# Altium PCB DSP6748_F.PcbDoc (part 16 of 16)
Units mil, origin at the board's own origin, x right, y up, seen from the top; angles counter-clockwise.
Board outline 8188.98 x 4055.12 mil, 4 copper layers (Top Layer, GND, VCC, Bottom Layer); 409 components, 262 nets, 1424 pads, 350 vias.
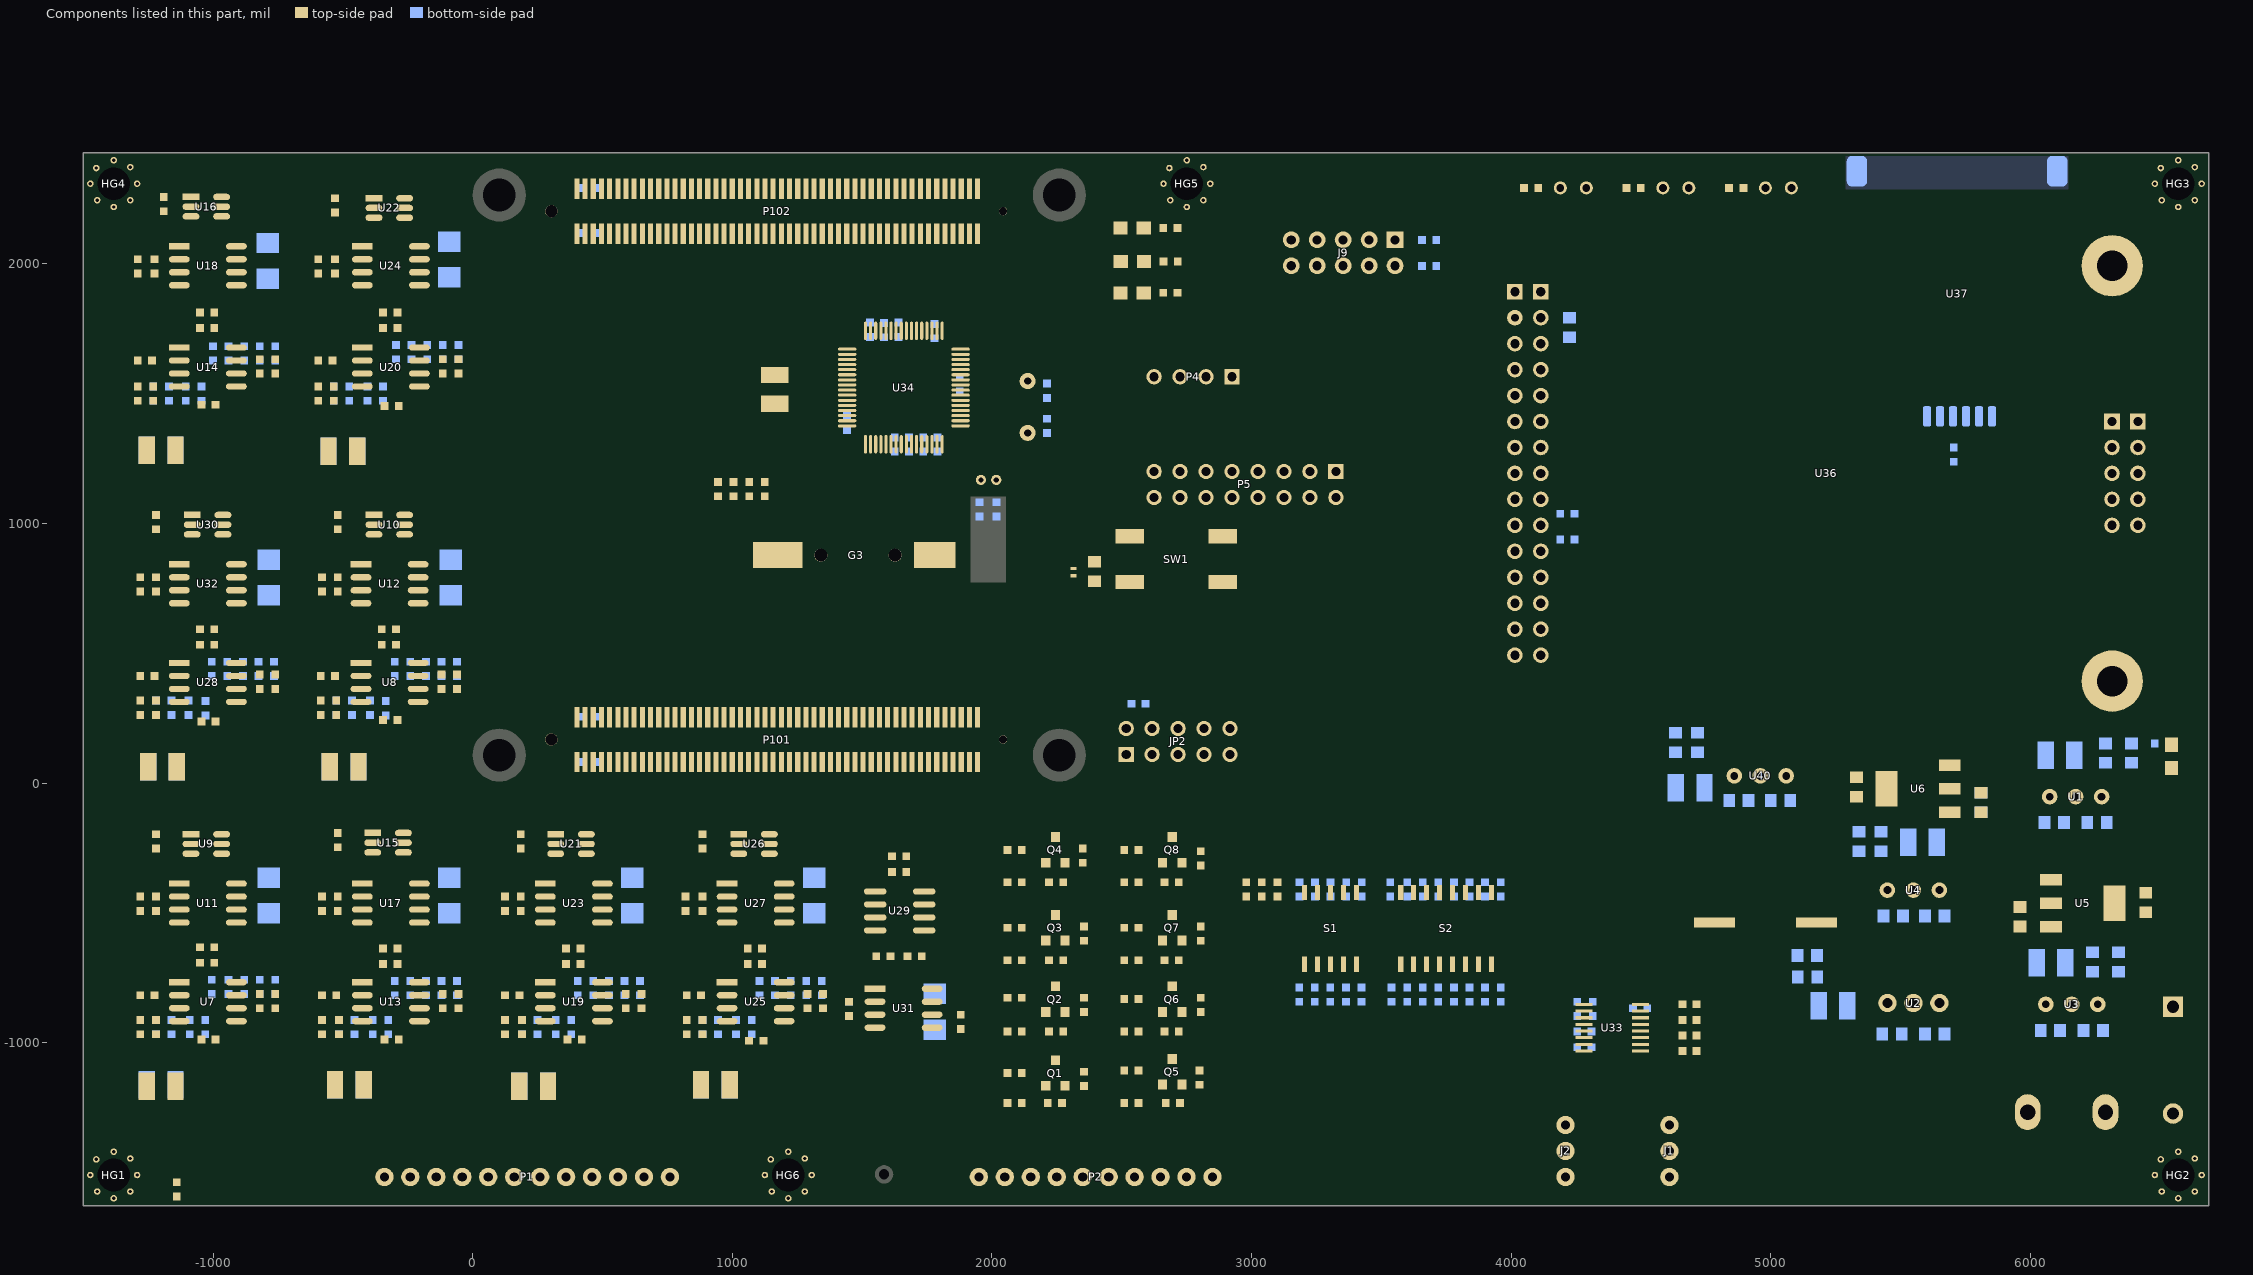
[diagram p18: the components of this part, seen from the top]

## Via types
v1: diameter 21, hole 10, Top Layer to Bottom Layer, 244 vias
v2: diameter 20, hole 10, Top Layer to Bottom Layer, 84 vias
v3: diameter 32, hole 16, Top Layer to Bottom Layer, 11 vias
v4: diameter 24, hole 12, Top Layer to Bottom Layer, 7 vias
v5: diameter 39.37, hole 19.68, Top Layer to Bottom Layer, 3 vias
v6: diameter 30, hole 15, Top Layer to Bottom Layer, 1 vias

## Nets (pads, with @x,y where several pads share a name; then routed paths per layer and width w, separated by ;. In a path a pad name is that pad's centre, name@x,y a point inside that pad or via, vN(x,y) a via of type N, cw(c..) or ccw(c..) an arc to the next point about the centre after c; other vN are vias at no path point) (continued)
pads on no net: "HG1. " "HG2. " "HG3. " "HG4. " "HG5. " "HG6. " G3.3 G3.4 JP2.7 JP2.8 P101.5 P101.33 P101.34 P101.35 P101.36 P101.37 P101.38 P101.39 P101.40 P101.43 P101.44 P101.45 P101.46 P101.47 P101.49 P101.51 P101.52 P101.53 P101.54 P101.55 P101.57 P101.61 P101.63 P101.65 P101.67 P101.73 P101.75 P101.79 P101.81 P101.101 P101.102 P102.6 P102.8 P102.10 P102.12 P102.14 P102.16 P102.18 P102.20 P102.21 P102.22 P102.26 P102.28 P102.30 P102.32 P102.34 P102.36 P102.38 P102.40 P102.43 P102.44 P102.45 P102.46 P102.48 P102.50 P102.52 P102.54 P102.55 P102.56 P102.57 P102.58 P102.61 P102.62 P102.63 P102.64 P102.65 P102.66 P102.67 P102.68 P102.70 P102.72 P102.74 P102.76 P102.79 P102.80 P102.81 P102.82 P102.83 P102.84 P102.85 P102.86 P102.88 P102.90 P102.92 P102.93 P102.94 P102.97 P102.98 P102.99 P102.100 P102.101 P102.102 U7.1 U7.5 U7.8 U8.1 U8.5 U8.8 U11.1 U11.3 U11.5 U11.7 U11.8 U12.1 U12.3 U12.5 U12.7 U12.8 U13.1 U13.5 U13.8 U14.1 U14.5 U14.8 U17.1 U17.3 U17.5 U17.7 U17.8 U18.1 U18.3 U18.5 U18.7 U18.8 U19.1 U19.5 U19.8 U20.1 U20.5 U20.8 U23.1 U23.3 U23.5 U23.7 U23.8 U24.1 U24.3 U24.5 U24.7 U24.8 U25.1 U25.5 U25.8 U27.1 U27.3 U27.5 U27.7 U27.8 U28.1 U28.5 U28.8 U31.1 U31.3 U31.5 U31.7 U31.8 U32.1 U32.3 U32.5 U32.7 U32.8 U34.2 U34.8 U34.9 U34.24 U34.25 U34.37 U34.38 U34.39 U34.40 U34.41 U34.44 U34.45 U34.50 U34.51 U34.52 U34.53 U34.54 U34.55 U34.56 U34.57 U34.61 U34.62 U36.0 U36.J1-6 U36.J1-7 U36.J1-8 U36.J1-11 U36.J1-12 U36.J1-13 U36.J2-10 U36.J2-11 U36.J3-3 U36.J4-1 U36.J4-2 U36.J4-3 U36.J4-4 U36.J4-5

## Polygon pours and split planes (outlines as drawn)
GND on Top Layer "gndt" (solid, remove dead copper, pour order 5): 6389.21,2357.71 6409.21,2337.71 6409.21,2319.1 6409.21,2187.71 6434.21,2162.71 6629.21,2162.71 6631.65,2160.27 6659.21,2132.71 6659.21,-1342.29 6634.21,-1367.29 6439.21,-1367.29 6409.21,-1397.29 6409.21,-1542.29 6384.21,-1567.29 -1215.79,-1567.29 -1240.79,-1542.29 -1240.79,-1392.29 -1265.79,-1367.29 -1415.79,-1367.29 -1440.79,-1342.29 -1440.79,2132.71 -1415.79,2157.71 -1285.79,2157.71 -1237.01,2206.49 -1235.79,2207.71 -1235.79,2342.71 -1215.79,2362.71 -1195.79,2362.71 2854.21,2362.71 2882.99,2333.93 2884.21,2332.71 2884.21,2267.71 2919.21,2232.71 3834.21,2232.71 3859.21,2257.71 3859.21,2332.71 3884.21,2357.71 6389.21,2357.71
GND_EARTH on Top Layer "tgnd-earth" (solid, remove dead copper, pour order 6): -1290.19,-1392.48 -1265.19,-1417.48 -1265.19,-1467.48 -1265.19,-1567.48 -1240.19,-1592.48 -1185.19,-1592.48 6409.81,-1592.48 6434.81,-1567.48 6434.81,-1417.48 6459.81,-1392.48 6688.16,-1392.48 6688.16,-1422.48 6688.16,-1628.11 -1500.82,-1628.11 -1500.82,2427.01 6688.16,2427.01 6688.16,2207.52 6688.16,2182.52 6459.81,2182.52 6434.81,2207.52 6434.81,2357.52 6409.81,2382.52 3859.81,2382.52 3834.81,2357.52 3834.81,2282.52 3809.81,2257.52 2934.81,2257.52 2909.81,2282.52 2909.81,2357.52 2884.81,2382.52 -1240.19,2382.52 -1265.19,2357.52 -1265.19,2322.52 -1265.19,2207.52 -1290.19,2182.52 -1440.19,2182.52 -1465.19,2157.52 -1465.19,-1367.48 -1440.19,-1392.48 -1290.19,-1392.48
GND_EARTH on Bottom Layer "egndb" (solid, remove dead copper, pour order 8): -1265.19,2357.52 -1240.19,2382.52 2884.81,2382.52 2909.81,2357.52 2909.81,2282.52 2934.81,2257.52 3809.81,2257.52 3834.81,2282.52 3834.81,2357.52 3859.81,2382.52 6409.81,2382.52 6430.55,2361.78 6434.81,2357.52 6434.81,2207.52 6459.81,2182.52 6679.49,2182.52 6679.49,2418.34 -1492.15,2418.34 -1492.15,-1619.44 6679.49,-1619.44 6679.49,-1392.48 6459.81,-1392.48 6434.81,-1417.48 6434.81,-1567.48 6409.81,-1592.48 -1240.19,-1592.48 -1265.19,-1567.48 -1265.19,-1417.48 -1290.19,-1392.48 -1440.19,-1392.48 -1465.19,-1367.48 -1465.19,2157.52 -1440.19,2182.52 -1290.19,2182.52 -1265.19,2207.52 -1265.19,2357.52
GND on Bottom Layer "gndb" (solid, remove dead copper, pour order 7): -1416.2,2157.45 -1286.2,2157.45 -1236.2,2207.45 -1236.2,2342.45 -1216.2,2362.45 2853.8,2362.45 2883.8,2332.45 2883.8,2282.45 2883.8,2267.45 2908.8,2242.45 2918.8,2232.45 2938.8,2232.45 3833.8,2232.45 3858.8,2257.45 3858.8,2332.45 3883.8,2357.45 6388.8,2357.45 6408.8,2337.45 6408.8,2307.45 6408.8,2187.45 6433.8,2162.45 6478.8,2162.45 6628.8,2162.45 6658.8,2132.45 6658.8,-1342.55 6633.8,-1367.55 6438.8,-1367.55 6408.8,-1397.55 6408.8,-1542.55 6383.8,-1567.55 -1216.2,-1567.55 -1241.2,-1542.55 -1241.2,-1392.55 -1266.2,-1367.55 -1416.2,-1367.55 -1441.2,-1342.55 -1441.2,2132.45 -1416.2,2157.45
GND on GND (split plane): 6570.05,2308.9 6668.06,2308.9 6668.06,-1510 6570.05,-1510 6570.05,-1608.01 -1382.71,-1608.01 -1382.71,-1510 -1480.72,-1510 -1480.72,2308.9 -1382.71,2308.9 -1382.71,2406.91 6570.05,2406.91
VCC+3V3 on VCC (split plane): 6529.81,2267.52 6668.06,2267.52 6668.06,-107.39 5174.9,-107.39 5174.9,82.52 5174.55,85.13 5173.54,87.56 5171.94,89.65 5134.46,127.13 5132.37,128.73 5129.94,129.74 5127.33,130.09 3482.33,130.09 3479.72,129.74 3477.29,128.73 3475.2,127.13 3428.15,80.09 931.51,80.09 674.9,336.7 674.9,2406.91 6529.81,2406.91
VCC_MCU on VCC (split plane): 2038.59,1129.56 1181.71,1129.56 1181.71,1854.96 2038.59,1854.96
VCC+24V on VCC (split plane): 5854.72,-836.66 5854.72,-1608.01 319.9,-1608.01 319.9,-1476.66 368.99,-1427.57 984.81,-1427.57 987.42,-1427.22 989.85,-1426.22 991.94,-1424.61 1088.99,-1327.57 2174.81,-1327.57 2177.42,-1327.22 2179.85,-1326.22 2181.94,-1324.61 2218.99,-1287.57 4984.81,-1287.57 4987.42,-1287.22 4989.85,-1286.22 4991.94,-1284.61 5271.94,-1004.61 5273.54,-1002.52 5274.55,-1000.09 5274.9,-997.48 5274.9,-846.66 5368.99,-752.57 5770.63,-752.57
VCC+5V_C on VCC (split plane): 654.72,332.52 655.07,329.91 656.07,327.48 657.68,325.39 920.2,62.87 922.29,61.26 923.71,60.67 924.72,60.26 927.33,59.91 3432.33,59.91 3434.94,60.26 3437.37,61.26 3439.46,62.87 3486.51,109.91 5123.15,109.91 5154.72,78.34 5154.72,-107.39 481.66,-107.39 225.09,149.18 225.09,2386.82 224.74,2389.43 223.74,2391.86 222.13,2393.95 209.17,2406.91 654.72,2406.91
VCC+5V on VCC (split plane): 204.91,2382.64 204.91,145 205.26,142.39 206.26,139.96 207.87,137.87 470.35,-124.61 472.44,-126.22 474.87,-127.22 477.48,-127.57 5594.72,-127.57 5594.72,-217.48 5595.07,-220.09 5596.07,-222.52 5597.68,-224.61 5677.68,-304.61 5679.77,-306.22 5680.98,-306.72 5682.2,-307.22 5684.81,-307.57 6154.81,-307.57 6157.42,-307.22 6159.85,-306.22 6161.94,-304.61 6213.99,-252.57 6465.63,-252.57 6504.72,-291.66 6504.72,-443.3 6445.63,-502.39 3004.81,-502.39 3002.2,-502.74 3001.49,-503.03 2999.77,-503.75 2997.68,-505.35 2927.68,-575.35 2926.07,-577.44 2925.07,-579.87 2924.72,-582.48 2924.72,-898.3 2845.63,-977.39 2208.99,-977.39 2124.9,-893.3 2124.9,-527.48 2124.55,-524.87 2124.05,-523.65 2123.54,-522.44 2121.94,-520.35 2026.94,-425.35 1959.94,-358.35 1957.85,-356.75 1955.42,-355.74 1952.81,-355.39 1436.81,-355.39 1434.2,-355.74 1431.77,-356.75 1429.68,-358.35 1382.68,-405.35 1381.07,-407.44 1380.07,-409.87 1379.72,-412.48 1379.72,-572.48 1380.07,-575.09 1381.07,-577.52 1382.68,-579.61 1437.68,-634.61 1520.72,-717.66 1520.72,-816.48 1520.72,-942.3 1480.63,-982.39 994.9,-982.39 994.9,-887.48 994.55,-884.87 993.54,-882.44 991.94,-880.35 956.94,-845.35 954.85,-843.75 952.42,-842.74 949.81,-842.39 -961.01,-842.39 -1085.1,-718.3 -1085.1,-617.48 -1085.45,-614.87 -1086.16,-613.15 -1086.46,-612.44 -1088.06,-610.35 -1188.06,-510.35 -1190.15,-508.75 -1192.58,-507.74 -1195.19,-507.39 -1296.01,-507.39 -1330.1,-473.3 -1330.1,-176.66 -1256.01,-102.57 -255.19,-102.57 -252.58,-102.22 -250.15,-101.22 -248.06,-99.61 -158.06,-9.61 -156.46,-7.52 -155.45,-5.09 -155.1,-2.48 -155.1,272.52 -155.45,275.13 -156.16,276.85 -156.46,277.56 -158.06,279.65 -273.06,394.65 -275.15,396.25 -277.58,397.26 -280.19,397.61 -1231.01,397.61 -1345.1,511.7 -1345.1,1043.34 -1221.01,1167.43 -240.19,1167.43 -237.58,1167.78 -235.15,1168.78 -233.06,1170.39 -108.06,1295.39 -106.46,1297.48 -105.45,1299.91 -105.1,1302.52 -105.1,1525.52 -105.45,1528.13 -106.46,1530.56 -108.06,1532.65 -190.06,1614.65 -192.15,1616.25 -194.58,1617.26 -197.19,1617.61 -1480.72,1617.61 -1480.72,2262.52 -1340.19,2262.52 -1340.19,2406.91 180.64,2406.91
VREF1+1.3V on VCC (split plane): 1659.72,-532.48 1659.72,-997.48 1659.72,-1078.3 1605.63,-1132.39 -1029.13,-1132.39 -1065.1,-1096.42 -1065.1,-1026.66 -1041.01,-1002.57 1484.81,-1002.57 1487.42,-1002.22 1489.85,-1001.22 1491.94,-999.61 1537.94,-953.61 1539.54,-951.52 1540.55,-949.09 1540.9,-946.48 1540.9,-816.48 1540.9,-713.48 1540.55,-710.87 1539.84,-709.15 1539.54,-708.44 1537.94,-706.35 1451.94,-620.35 1399.9,-568.3 1399.9,-416.66 1440.99,-375.57 1659.72,-375.57
VCC-5V on VCC (split plane): 185 vertices, not listed, extent -1480.72,-1608.01 6668.06,1597.43

## Keep-outs
Keep-Out Layer:
  lines w5: -1500.82,-1628.11 -1290.19,-1628.11 -1155.19,-1628.11 6688.16,-1628.11 6688.16,2427.01 -1500.82,2427.01 -1500.82,-1628.11

## Other copper
Top Layer:
  rectangle net GND: 1915.15,772.82 2056.23,1109.52
  pour cut-out: 2603.81,2365 2603.81,2209.52 2633.81,2179.52 2863.81,2179.52 2898.81,2214.52 2898.81,2365
  region net GND: 4704.81,-487.48 4859.81,-487.48 4859.81,-572.48 4849.81,-582.48 4714.81,-582.48 4704.81,-572.48
  region net VCC+12V_ZLG_3G: 5094.81,-487.48 5094.81,-572.48 5104.81,-582.48 5244.81,-582.48 5254.81,-572.48 5254.81,-492.48 5249.81,-487.48
  region net VCC-5V: 5649.81,-92.48 5834.81,-92.48 5834.81,-207.48 5824.81,-217.48 5744.81,-217.48 5734.81,-207.48 5734.81,-152.48 5724.81,-142.48 5659.81,-142.48 5649.81,-132.48
  region net VCC-6V5: 5304.81,-32.48 5439.81,-32.48 5449.81,-42.48 5449.81,-87.48 5444.81,-92.48 5398.76,-92.48 5384.81,-106.43 5384.81,-152.48 5379.81,-157.48 5309.81,-157.48 5304.81,-152.48
  region net VCC+6V5: 5934.81,-532.48 6229.81,-532.48 6239.81,-542.48 6239.81,-609.98 6228.18,-621.61 6114.81,-621.61 6099.81,-606.61 6099.81,-582.48 6094.81,-577.48 5939.81,-577.48 5934.81,-572.48
  region net VCC+5V: 6469.81,-442.48 6289.81,-442.48 6284.81,-437.48 6284.81,-302.48 6469.81,-302.48
  pour cut-out: 1059.81,-1567.48 1059.81,-1422.48 1089.81,-1392.48 1334.81,-1392.48 1359.81,-1417.48 1359.81,-1567.48
Bottom Layer:
  pour cut-out: 2603.81,2364 2603.81,2209.52 2633.81,2179.52 2863.81,2179.52 2898.81,2214.52 2898.81,2364
  region net VCC-6V5: 5324.81,-217.48 5314.81,-207.48 5314.81,-94.98 5324.81,-84.98 5377.31,-84.98 5384.81,-92.48 5384.81,-162.48 5389.81,-167.48 5549.81,-167.48 5559.81,-177.48 5559.81,-212.48 5554.81,-217.48
  region net NetC14_1: 5609.81,-207.48 5609.81,-302.48 5599.81,-312.48 5524.81,-312.48 5514.81,-322.48 5514.81,-432.48 5524.81,-442.48 5569.81,-442.48 5579.81,-432.48 5579.81,-362.48 5589.81,-352.48 5663.94,-352.48 5674.81,-341.61 5674.81,-207.48
  region net VCC+6V5: 6137.88,-532.48 6354.81,-532.48 6369.81,-547.48 6369.81,-667.48 6359.81,-677.48 6299.81,-677.48 6294.81,-672.48 6294.81,-622.48 6284.81,-612.48 6139.81,-612.48 6134.81,-607.48 6134.81,-535.55
  pour cut-out: 1059.81,-1567.48 1059.81,-1423.11 1089.81,-1392.48 1334.81,-1392.48 1359.81,-1417.48 1359.81,-1567.48
GND (plane layer: these items are gaps in the copper):
  rectangle: -1492.15,2308.9 -1382.71,2418.34
  rectangle: 6570.05,2308.9 6679.49,2418.34
  rectangle: 6570.05,-1613.34 6679.49,-1510
  rectangle: -1492.15,-1619.44 -1382.71,-1510
VCC (plane layer: these items are gaps in the copper):
  rectangle: 6529.81,2267.52 6688.16,2427.01
  rectangle: 6529.81,-1628.11 6688.16,-1467.48
  rectangle: -1495.19,2262.52 -1340.19,2427.01
  rectangle: -1492.15,-1619.44 -1340.19,-1467.48
  lines w20: -1500.82,1612.52 -1495.82,1607.52 -197.19,1607.52 -115.19,1525.52 -115.19,1302.52 -240.19,1177.52 -1225.19,1177.52 -1355.19,1047.52 -1355.19,507.52 -1235.19,387.52 -280.19,387.52 -165.19,272.52 -165.19,-2.48 -255.19,-92.48 -1260.19,-92.48 -1340.19,-172.48 -1340.19,-477.48 -1300.19,-517.48 -1195.19,-517.48 -1095.19,-617.48 -1095.19,-722.48 -965.19,-852.48 949.81,-852.48 984.81,-887.48 984.81,-992.48 ; 175.75,2426.06 215,2386.82 215,145 477.48,-117.48 6409.81,-117.48 6688.16,-117.48 ; 309.81,-1628.11 309.81,-1472.48 364.81,-1417.48 984.81,-1417.48 1084.81,-1317.48 2174.81,-1317.48 2214.81,-1277.48 3144.81,-1277.48 4984.81,-1277.48 5264.81,-997.48 5264.81,-842.48 5364.81,-742.48 5774.81,-742.48 5864.81,-832.48 5864.81,-1617.48 5869.81,-1622.48 ; 664.81,2423 664.81,332.52 927.33,70 3432.33,70 3482.33,120 5127.33,120 5164.81,82.52 5164.81,-117.48 ; 1669.81,-365.48 1669.81,-532.48 1669.81,-997.48 1669.81,-1082.48 1609.81,-1142.48 -1033.31,-1142.48 -1075.19,-1100.6 -1075.19,-1022.48 -1045.19,-992.48 1484.81,-992.48 1530.81,-946.48 1530.81,-816.48 1530.81,-713.48 1444.81,-627.48 1389.81,-572.48 1389.81,-412.48 1436.81,-365.48 1952.81,-365.48 2019.81,-432.48 2114.81,-527.48 2114.81,-897.48 2204.81,-987.48 2849.81,-987.48 2934.81,-902.48 2934.81,-582.48 3004.81,-512.48 3159.81,-512.48 6449.81,-512.48 6514.81,-447.48 6514.81,-287.48 6469.81,-242.48 6409.81,-242.48 6209.81,-242.48 6154.81,-297.48 5684.81,-297.48 5604.81,-217.48 5604.81,-117.48
  lines w25: 1169.15,1117 1169.15,1867.52 2051.15,1867.52 2051.15,1117 1169.15,1117

## Silkscreen, mask and mechanical layers (free items; w line width, h text height)
Top Overlay:
  rectangle: 4059.81,-382.48 4684.81,-187.48
  lines w3: 3004.81,-1232.48 3934.81,-1232.48 ; 3004.81,-1157.48 3934.81,-1157.48 ; 3004.81,-1082.48 3934.81,-1082.48 ; 3004.81,-1003.32 3934.81,-1003.32 ; 3004.81,-937.48 3934.81,-937.48 ; 3004.81,-857.48 3934.81,-857.48
  lines w11.81: 0,5 2362.2,5 2362.2,2367.2 0,2367.2 0,5
  text "NET" at 4194.81,2407.52 h60
  text "LINK" at 4579.81,2402.52 h60
  text "ACT" at 4984.81,2402.52 h60
  text "SD_UART" at 2982.29,2245 h60
  text "CDMA2000" at 5573,2234.11 h60
  text "SIM_CARD" at 5578,2190 h60
  text "ZLG_3G" at 5179.81,1222.52 h60
  text "SIG7" at -850.19,1207.52 h60
  text "SIG8" at -155.19,1207.52 h60
  text "FPGA_JTAG" at 2487.29,295 h60
  text "SIG5" at -855.19,-17.48 h60
  text "SIG6" at -155.19,-17.48 h60
  text "3M_ADC_V2.0" at 4054.81,-132.48 h60
  text "S/N:" at 3809.81,-292.48 h60
  text "BOOT SET" at 3024.91,-847.38 h60
  text "4" at 3560.91,-847.38 h40
  text "3" at 3655.91,-847.38 h40
  text "2" at 3740.91,-847.38 h40
  text "1" at 3820.91,-847.38 h40
  text "0" at 3900.91,-847.38 h40
  text "NAND-8EMIF" at 3024.91,-922.38 h60
  text "0" at 3560.91,-927.38 h40
  text "1" at 3655.91,-927.38 h40
  text "1" at 3740.91,-927.38 h40
  text "1" at 3820.91,-927.38 h40
  text "0" at 3900.91,-927.38 h40
  text "MMC/SD0" at 3024.91,-992.38 h60
  text "1" at 3560.91,-997.38 h40
  text "1" at 3655.91,-997.38 h40
  text "1" at 3740.91,-997.38 h40
  text "0" at 3820.91,-997.38 h40
  text "0" at 3900.91,-997.38 h40
  text "DEBUG" at 3019.91,-1067.38 h60
  text "1" at 3560.91,-1072.38 h40
  text "1" at 3655.91,-1072.38 h40
  text "1" at 3740.91,-1072.38 h40
  text "1" at 3820.91,-1072.38 h40
  text "0" at 3900.91,-1072.38 h40
  text "GND" at 5929.81,-1132.48 h60
  text "VCC+24V" at 6184.81,-1132.48 h60
  text "UART2" at 3019.91,-1142.38 h60
  text "1" at 3560.91,-1147.38 h40
  text "0" at 3655.91,-1147.38 h40
  text "1" at 3740.91,-1147.38 h40
  text "0" at 3820.91,-1147.38 h40
  text "0" at 3900.91,-1147.38 h40
  text "3G-CONFIG" at 4104.81,-1207.48 h60
  text "UART2" at 4509.81,-1207.48 h60
  text "UART1" at 3019.91,-1217.38 h60
  text "1" at 3560.91,-1222.38 h40
  text "0" at 3655.91,-1222.38 h40
  text "1" at 3740.91,-1222.38 h40
  text "1" at 3820.91,-1222.38 h40
  text "1" at 3900.91,-1222.38 h40
  text "SIG1" at -850.19,-1237.48 h60
  text "SIG2" at -155.19,-1242.48 h60
  text "SIG3" at 544.81,-1242.48 h60
  text "SIG4" at 1244.81,-1242.48 h60
  text "TXD" at 3989.81,-1337.48 h60
  text "TXD" at 4394.81,-1337.48 h60
  text "RXD" at 3989.81,-1432.48 h60
  text "GND" at 1549.81,-1437.48 h40
  text "RXD" at 4394.81,-1437.48 h60
  text "SIG_IN" at -550.19,-1502.48 h40
  text "AST" at 1755,-1505 h60
  text "GND" at 3984.81,-1537.48 h60
  text "GND" at 4384.81,-1537.48 h60
  text "......" at -35.19,-1647.48 h60
  text "......" at 2264.81,-1647.48 h60
  text "AST1" at 1904.81,-1652.48 h40
  text "AST8" at 2604.81,-1652.48 h40
  text "GND" at 2714.81,-1652.48 h40
  text "GND" at 2819.81,-1652.48 h40
  text "SIG1" at -380.19,-1657.48 h40
  text "SIG8" at 324.81,-1657.48 h40
  text "VCC+24V" at 434.81,-1657.48 h40
  text "GND" at 624.81,-1657.48 h40
  text "GND" at 724.81,-1657.48 h40
Mechanical 1:
  lines w5: -1540.19,-1588.74 ccw(c-1461.45,-1588.74) -1461.45,-1667.48 6648.79,-1667.48 ccw(c6648.79,-1588.74) 6727.53,-1588.74 6727.53,2387.64 ccw(c6648.79,2387.64) 6648.79,2466.38 -1461.45,2466.38 ccw(c-1461.45,2387.64) -1540.19,2387.64 -1540.19,-1588.74

## Text inside footprints (layer, text, board x,y; h text height)
DD1: Mechanical 8 "1" at 2314.77,842.02 h20 r270; Mechanical 8 "2" at 2314.77,814.42 h20 r270
G3: Mechanical 8 "2" at 1175.15,869.52 h20 r270; Mechanical 8 "1" at 1779.15,869.52 h20 r270; Mechanical 8 "4" at 1331.15,856.52 h20 r270; Mechanical 8 "3" at 1616.15,856.52 h20 r270
HG1: Mechanical 8 "8" at -1394.71,-1420 h30; Mechanical 8 "3" at -1458.31,-1573.6 h30; Mechanical 8 "7" at -1331.01,-1446.3 h30; Mechanical 8 "5" at -1331.01,-1573.6 h30; Mechanical 8 "1" at -1461.91,-1449.9 h30; Mechanical 8 "2" at -1484.71,-1510 h30; Mechanical 8 "4" at -1394.71,-1600 h30; Mechanical 8 "6" at -1304.71,-1510 h30
HG2: Mechanical 8 "8" at 6558.05,-1420 h30; Mechanical 8 "3" at 6494.44,-1573.6 h30; Mechanical 8 "7" at 6621.74,-1446.3 h30; Mechanical 8 "5" at 6621.74,-1573.6 h30; Mechanical 8 "1" at 6490.84,-1449.9 h30; Mechanical 8 "2" at 6468.05,-1510 h30; Mechanical 8 "4" at 6558.05,-1600 h30; Mechanical 8 "6" at 6648.05,-1510 h30
HG3: Mechanical 8 "6" at 6648.05,2308.9 h30; Mechanical 8 "4" at 6558.05,2218.9 h30; Mechanical 8 "2" at 6468.05,2308.9 h30; Mechanical 8 "1" at 6490.84,2369 h30; Mechanical 8 "5" at 6621.74,2245.29 h30; Mechanical 8 "7" at 6621.74,2372.59 h30; Mechanical 8 "3" at 6494.44,2245.29 h30; Mechanical 8 "8" at 6558.05,2398.9 h30
HG4: Mechanical 8 "8" at -1394.71,2398.9 h30; Mechanical 8 "3" at -1458.31,2245.29 h30; Mechanical 8 "7" at -1331.01,2372.59 h30; Mechanical 8 "5" at -1331.01,2245.29 h30; Mechanical 8 "1" at -1461.91,2369 h30; Mechanical 8 "2" at -1484.71,2308.9 h30; Mechanical 8 "4" at -1394.71,2218.9 h30; Mechanical 8 "6" at -1304.71,2308.9 h30
HG5: Mechanical 8 "6" at 2829.15,2308.9 h30; Mechanical 8 "4" at 2739.15,2218.9 h30; Mechanical 8 "2" at 2649.15,2308.9 h30; Mechanical 8 "1" at 2671.95,2369 h30; Mechanical 8 "5" at 2802.84,2245.29 h30; Mechanical 8 "7" at 2802.84,2372.59 h30; Mechanical 8 "3" at 2675.55,2245.29 h30; Mechanical 8 "8" at 2739.15,2398.9 h30
HG6: Mechanical 8 "6" at 1293.72,-1510 h30; Mechanical 8 "4" at 1203.72,-1600 h30; Mechanical 8 "2" at 1113.72,-1510 h30; Mechanical 8 "1" at 1136.51,-1449.9 h30; Mechanical 8 "5" at 1267.41,-1573.6 h30; Mechanical 8 "7" at 1267.41,-1446.3 h30; Mechanical 8 "3" at 1140.11,-1573.6 h30; Mechanical 8 "8" at 1203.72,-1420 h30
JP2: Top Overlay "1" at 2437.29,90 h50; Top Overlay "2" at 2417.29,190 h50
U36: Top Overlay "J3" at 6384.81,888.52 h30; Top Overlay "J4" at 6284.81,888.52 h30; Top Overlay "J1" at 3994.81,392.52 h30; Top Overlay "J2" at 4094.81,392.52 h30